# Altium PCB Optical_Fiber.PcbDoc
Units mm, origin at the board's own origin, x right, y up, seen from the top; angles counter-clockwise.
Board outline 23.5 x 20.5 mm, 2 copper layers (Top Layer, Bottom Layer); 15 components, 8 nets, 44 pads, 5 vias.
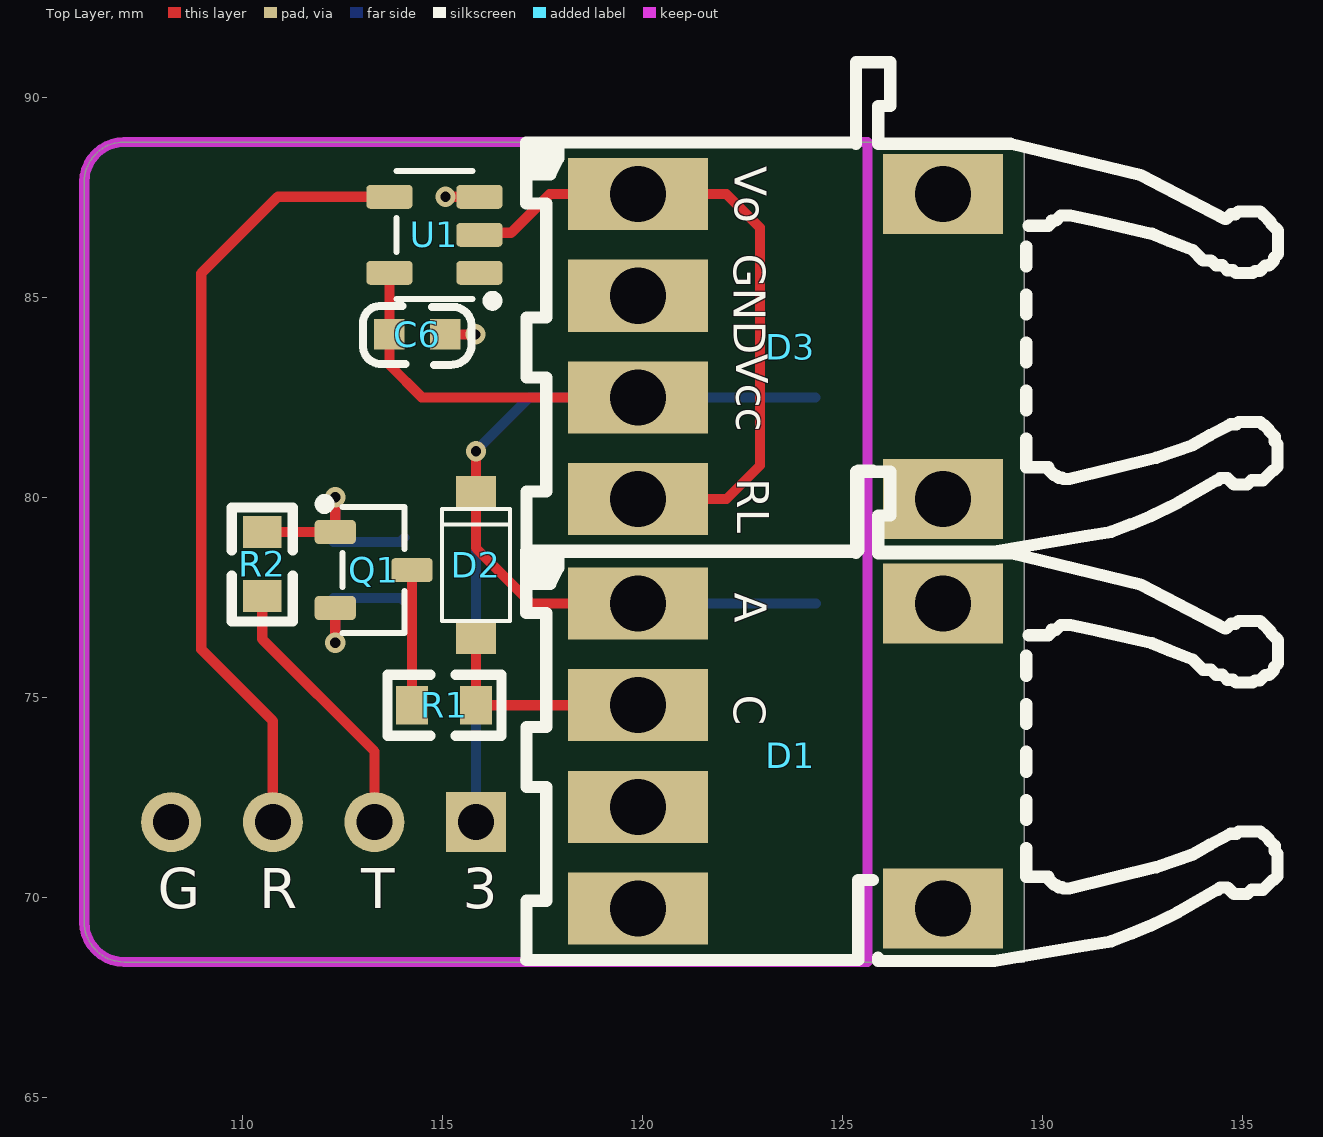
[diagram p0: Top Layer view]
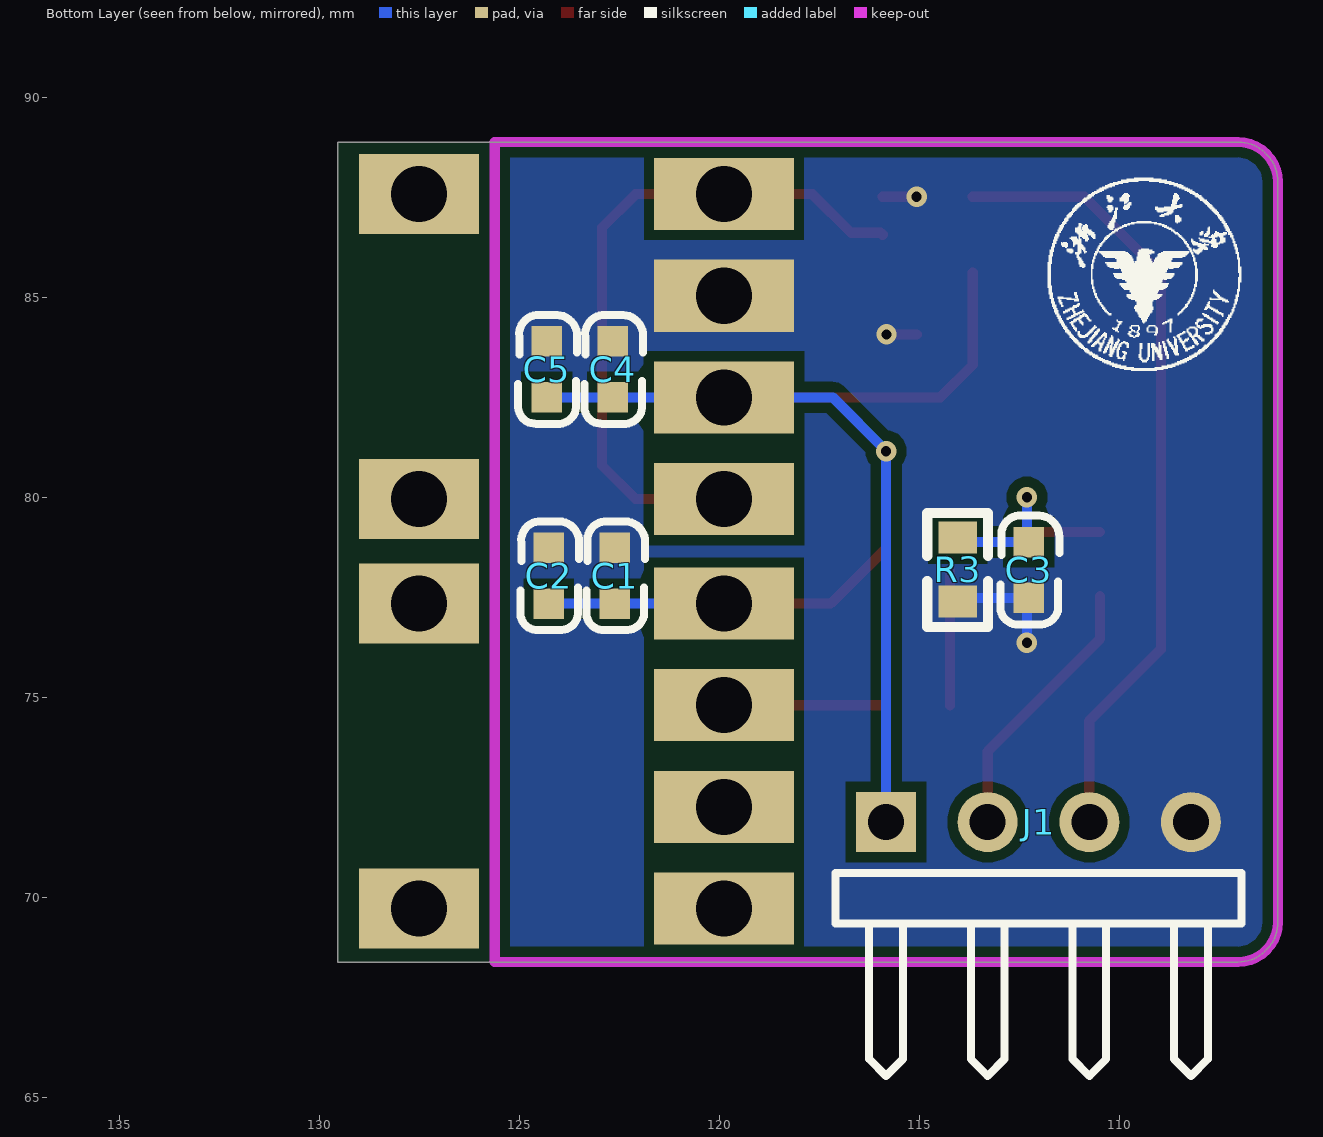
[diagram p1: Bottom Layer view, seen from below]
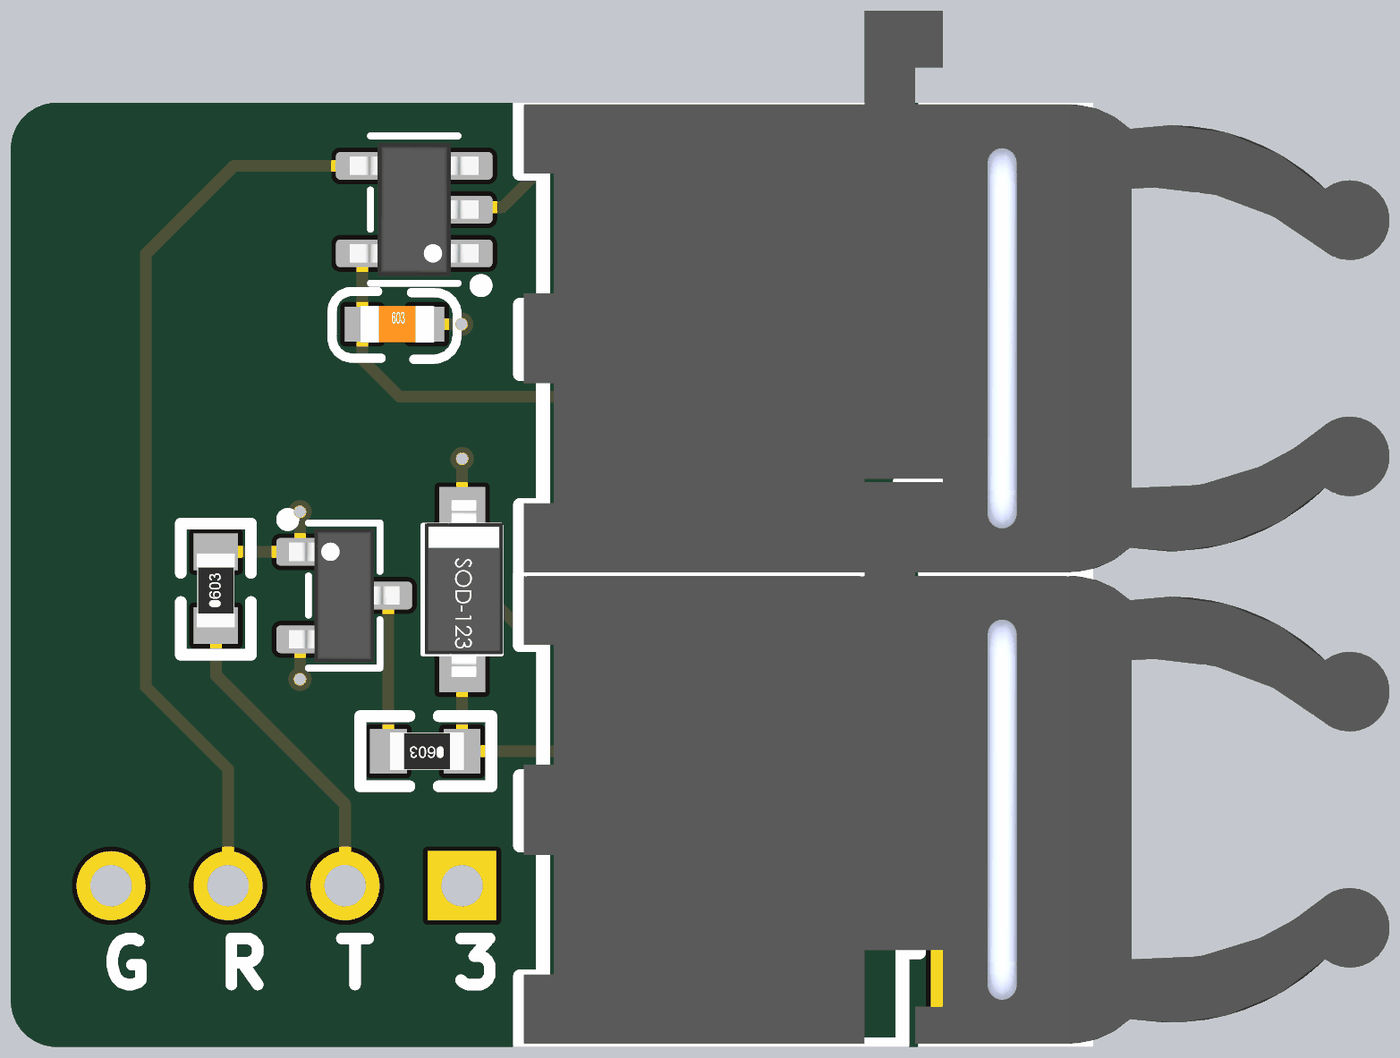
[diagram p2: 3D render of the assembled board from above, using the file's embedded part models]
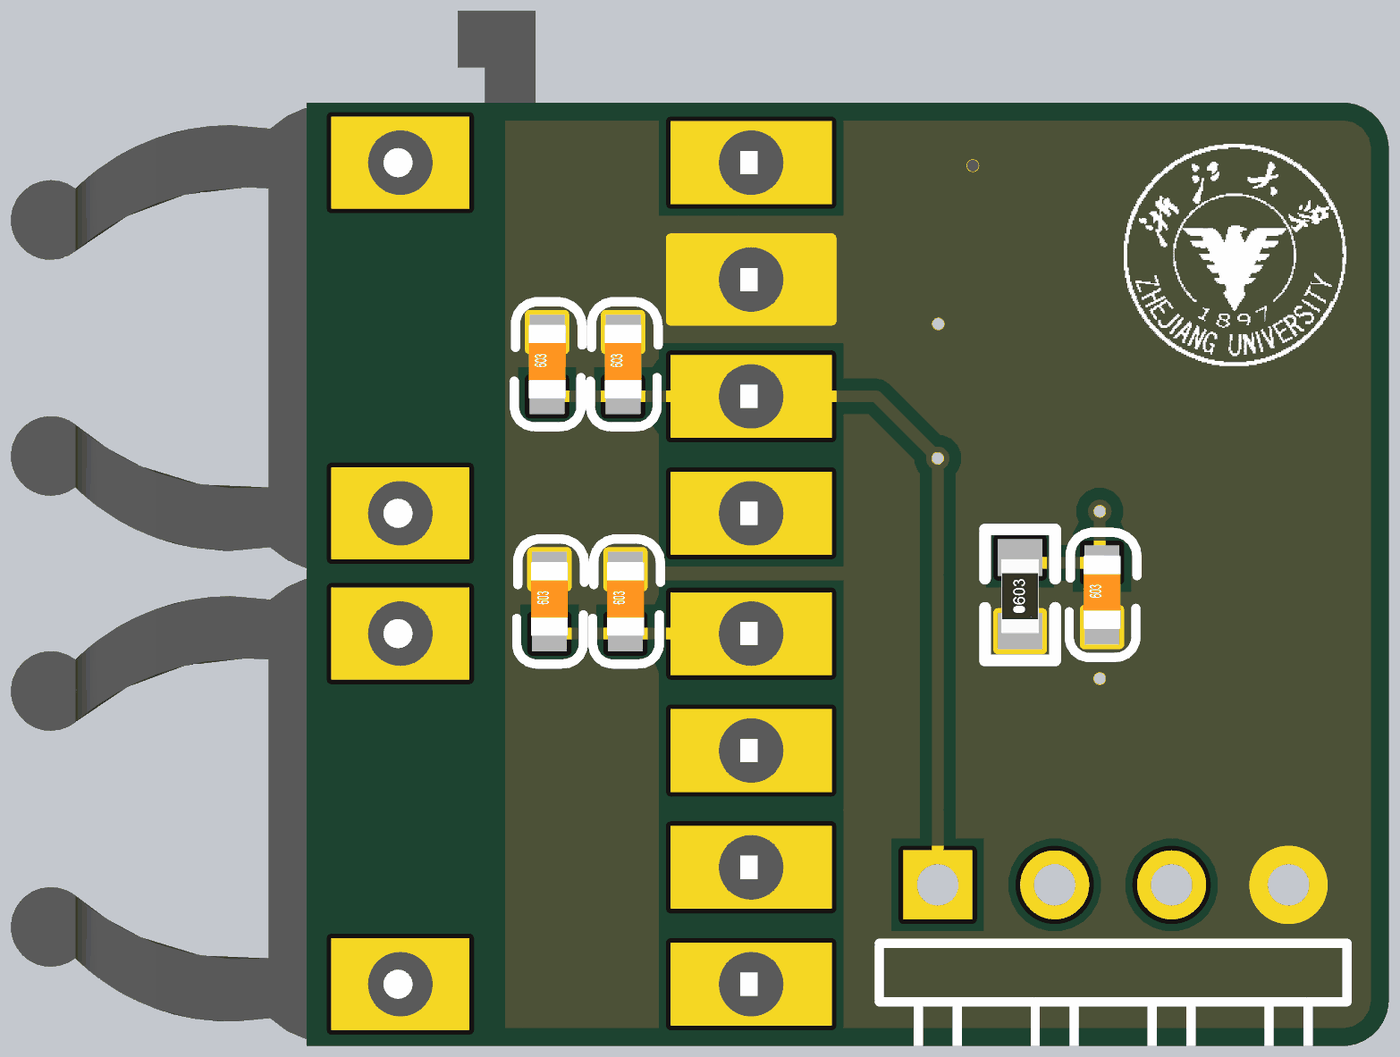
[diagram p3: 3D render of the assembled board from below, using the file's embedded part models]

## Layer stack, top to bottom
Top Solder: solder mask 0.0102, Solder Resist, Dk 3.5
Top Layer: signal copper 0.0356
Dielectric 1: dielectric 0.32, FR-4, Dk 4.8
Bottom Layer: signal copper 0.0356
Bottom Solder: solder mask 0.0102, Solder Resist, Dk 3.5

## Board outline
106.04,69.383 ccw(c107.04,69.383) 107.04,68.383 129.54,68.383 129.54,88.883 107.04,88.883 ccw(c107.04,87.883) 106.04,87.883

## Design rules (kind name [scope] priority, off if disabled: settings)
Clearance [All] p1: gap=0.254 ignorepadtopadclearanceinfootprint=FALSE
ComponentClearance [All] p1: gap=0 collisioncheckmode=3 verticalgap=0.254 showdistances=FALSE
Height [All] p1: minheight=0 maxheight=20 prefheight=10
PolygonConnect [All] p1: connectstyle=Direct reliefconductorwidth=0.254 reliefentries=4 polygonreliefangle="90 Angle" airgapwidth=0.254
RoutingVias [All] p1: holewidth=0.711 width=1.27 viastyle="Through Hole" minholewidth=0.711 minwidth=1.27 maxholewidth=0.711 maxwidth=1.27
SolderMaskExpansion [All] p1: expansion=0.102 istentingtop=FALSE
SupplyNets "Schematic Supply Nets_1" [InNet('GND')] p1: voltage=0.000
SupplyNets "Schematic Supply Nets" [InNet('3V3')] p2: voltage=0.000
Width [All] p1: maxlimit=0.254 minlimit=0.254 preferedwidth=0.254
28 further rules are at their usual default settings.

## Components (designator, comment, footprint, x,y, rotation, side; value= is the part's Value field where it differs from the comment)
C1 "100nF/100V" 0603C 122.627,77.338 r90 bottom
C2 "10uF/25V" 0603C 124.278,77.338 r90 bottom
C3 "1nF/50V" 0603C 112.277,77.48 r90 bottom
C4 "100nF/100V" 0603C 122.678,82.494 r90 bottom
C5 "10uF/25V" 0603C 124.329,82.494 r90 bottom
C6 "100nF/100V" 0603C 113.665,84.083 r0 top
D1 "HFBR-1522Z" HFBR_1521Z 123.698,73.533 r270 top
D2 "B5819WS" SOD-123 115.835,76.53 r90 top
D3 "HFBR-2522Z" HFBR_2521Z 123.698,83.769 r270 top
J1 "Pin HDR1X4" "Pin HDR1X4/2.54mm-W" 115.835,71.882 r180 bottom
Q1 "HL3400" SOT23-3 113.275,78.183 r270 top
R1 "25R, 1%" 0603R 115.835,74.803 r180 top
R2 "NC" 0603R 110.49,77.533 r90 top
R3 "4.7kR, 1%" 0603R 114.046,77.396 r90 bottom
U1 "SN74LVC1G14DBVR" SOT23-5 114.795,86.563 r90 top

## Footprints (in the part's own frame and the unit in brackets; to place one, negate y for a bottom-side part, rotate by r counter-clockwise, add the part's x,y. Pads: shape width x height; smd on the part's side, far side on the other; paste and mask are expansions set on the pad)
0603C [mil]
  rect 30x30 smd: 1(0.21,-0.35) 2(55.21,-0.35)
  silkscreen extent -26,-30 81,28, body extent -1,-16 61,15, height 12
0603R [mm]
  rect 0.8x0.965 smd: 1(0,0) 2(1.6,0)
  silkscreen extent -0.64,-0.76 2.21,0.76, body extent -0.04,-0.41 1.56,0.41, height 0.45
HFBR_1521Z [mm]
  rect 1.801x3.5 hole 1.402: 1(-3.81,-3.81) 2(-1.27,-3.81) 3(1.27,-3.81) 4(3.81,-3.81)
  rect 1.999x3 hole 1.402: 5(3.81,3.81) 8(-3.81,3.81)
  silkscreen extent -7.11,-6.61 5.12,12.18, body extent -7.11,-6.53 5.08,12.27, height 7.62
HFBR_2521Z [mm]
  rect 1.801x3.5 hole 1.402: 1(-3.81,-3.81) 2(-1.27,-3.81) 3(1.27,-3.81) 4(3.81,-3.81)
  rect 1.999x3 hole 1.402: 5(3.81,3.81) 8(-3.81,3.81)
  silkscreen extent -7.11,-6.61 5.12,12.18, body extent -7.11,-6.53 5.08,12.27, height 7.62
"Pin HDR1X4/2.54mm-W" [mm] "Connector; Header; 4 Position; Right Angle"
  rect 1.5x1.5 hole 0.9: 1(0,0)
  round 1.5 hole 0.9: 2(2.54,0) 3(5.08,0) 4(7.62,0)
  silkscreen extent -1.27,-6.35 8.89,-1.27, body extent -1.27,-10 8.89,0.35, height 2.54
SOD-123 [mm] "塑封二极管"
  rect 0.8x1 smd: A(-0.051,0) K(3.607,0)
  silkscreen extent 0.38,-0.85 3.18,0.85, body extent -0.12,-0.89 3.73,0.81, height 1.43
SOT23-3 [mm] "Small Outline Transistor, SOT-23 Type, 0.95 mm pitch; 3 pin, 2.90 mm L X 1.30 mm W X 1.15 mm H body"
  rrect33% 0.6x1.03 smd: 1(-0.95,-0.96) 2(0.95,-0.96) 3(0,0.96)
  silkscreen extent -1.77,-1.35 1.58,0.77, body extent -1.45,-1.2 1.45,1.2, height 1.15
SOT23-5 [mm] "Small Outline Transistor, SOT-23 Type, 0.95 mm pitch; 5 pin, 2.90 mm L X 1.60 mm W X 1.45 mm H body"
  rrect33% 0.6x1.15 smd: 1(-0.95,-1.125) 2(0,-1.125) 3(0.95,-1.125) 4(0.95,1.125) 5(-0.95,1.125)
  silkscreen extent -1.77,-1.58 1.6,0.95, body extent -1.45,-1.4 1.45,1.4, height 1.45

## Part data
C1 C4 C6: library part CAP, "CC0603KRX7R9BB104"
C2 C5: library part CAP, "CC0603MRX5R8BB106"
C3: library part CAP, "CC0603KRX7R9BB102"
D1: library part HFBR-1521Z, "Versatile Link Fiber-Optic Connection", Package=None, Check_prices=https://www.snapeda.com/parts/HFBR-2521Z/Broadcom/view-part/?ref=eda, MF="Broadcom Limited", MP=HFBR-2521Z, SnapEDA_Link=https://www.snapeda.com/parts/HFBR-2521Z/Broadcom/view-part/?ref=snap
D2: library part "DIODE SCHOTTKY"
D3: library part HFBR-2521Z, "Versatile Link Fiber-Optic Connection", Package=None, Check_prices=https://www.snapeda.com/parts/HFBR-2521Z/Broadcom/view-part/?ref=eda, MF="Broadcom Limited", MP=HFBR-2521Z, SnapEDA_Link=https://www.snapeda.com/parts/HFBR-2521Z/Broadcom/view-part/?ref=snap
Q1: library part NMOS
R1: library part RES, "RP0603BRD0725RL"
R2: library part RES
R3: library part RES, "RC0603FR-074K7L"
U1: "Y=A\"

## Via types
v1: diameter 0.508, hole 0.254, Top Layer to Bottom Layer, tented both sides, 5 vias

## Nets (pads, with @x,y where several pads share a name; then routed paths per layer and width w, separated by ;. In a path a pad name is that pad's centre, name@x,y a point inside that pad or via, vN(x,y) a via of type N, cw(c..) or ccw(c..) an arc to the next point about the centre after c; other vN are vias at no path point)
3V3: C1.1 C2.1 C4.1 C5.1 C6.1 D1.1 D2.K D3.3 J1.1 U1.5 | length 38.7
  Top Layer w0.254: U1.5 C6.1 113.67,83.307 114.478,82.499 D3.3 ; v1(115.835,81.153) D2.K 115.835,78.729 117.221,77.343 D1.1
  Bottom Layer w0.254: v1@115.83,81.159 117.17,82.499 D3.3 C4.1 C5.1 ; J1.1 v1(115.835,81.153) ; D1.1 C1.1 C2.1 C2.1@124.333,77.343
GND: C1.2 C2.2 C3.1 C4.2 C5.2 C6.2 D3.2 J1.4 Q1.2 R3.1 U1.3 | length 5.4
  Top Layer w0.254: v1(112.315,76.366) Q1.2 ; C6.2 v1(115.824,84.074) ; v1(115.072,87.513) U1.3
  Bottom Layer w0.254: v1(112.315,76.366) 112.315,77.439 C3.1 113.956,77.486 R3.1
NetC3_2: C3.2 Q1.1 R2.2 R3.2 | length 5.7
  Top Layer w0.254: R2.2 Q1.1 v1(112.315,80.001)
  Bottom Layer w0.254: v1(112.315,80.001) 112.315,78.93 C3.2 113.933,78.883 R3.2
NetD1_2: D1.2 D2.A R1.1 | length 5.7
  Top Layer w0.254: D2.A R1.1 D1.2
NetD3_1: D3.1 D3.4 U1.2 | length 17.1
  Top Layer w0.254: U1.2 115.971,86.614 116.713,86.614 117.678,87.579 D3.1 122.098,87.579 122.936,86.741 122.936,80.797 122.098,79.959 D3.4
NetQ1_3: Q1.3 R1.2 | length 3.4
  Top Layer w0.254: R1.2 Q1.3
OP_RX: J1.3 U1.4 | length 20
  Top Layer w0.254: J1.3 110.755,74.411 108.966,76.2 108.966,85.598 110.881,87.513 U1.4
OP_TX: J1.2 R2.1 | length 6.8
  Top Layer w0.254: R2.1 110.49,76.454 113.295,73.649 J1.2
pads on no net: D1.3 D1.4 D1.5 D1.8 D3.5 D3.8 U1.1

## Polygon pours and split planes (outlines as drawn)
GND on Bottom Layer "Bottom Layer-GND" (solid, remove dead copper, pour order 0): 106.04,69.383 ccw(c107.04,69.383) 107.04,68.383 125.603,68.383 125.603,88.883 107.04,88.883 ccw(c107.04,87.883) 106.04,87.883

## Keep-outs
Keep-Out Layer:
  lines w0.254: 106.04,69.383 ccw(c107.04,69.383) 107.04,68.383 125.619,68.383 125.619,88.883 107.04,88.883 ccw(c107.04,87.883) 106.04,87.883 106.04,69.383

## Silkscreen, mask and mechanical layers (free items; w line width, h text height)
Top Overlay:
  text "G" at 107.882,69.723 h1
  text "R" at 110.422,69.723 h1
  text "T" at 112.962,69.723 h1
  text "3" at 115.502,69.723 h1
Bottom Overlay:
  drawing of 39 lines, arcs and shapes, not listed
Mechanical 1:
  the board outline again, w0.254

## Text inside footprints (layer, text, board x,y; h text height)
D1: Top Overlay "A" at 122.3,77.61 h0.8 r270; Top Overlay "C" at 122.284,75.07 h0.8 r270
D3: Top Overlay "Vo" at 122.3,88.277 h0.8 r270; Top Overlay "GND" at 122.284,86.093 h0.8 r270; Top Overlay "RL" at 122.363,80.477 h0.8 r270; Top Overlay "Vcc" at 122.345,83.594 h0.8 r270